# Altium PCB 12.4呼叫器.PcbDoc (part 2 of 5)
Units mm, origin at the board's own origin, x right, y up, seen from the top; angles counter-clockwise.
Board outline 60 x 92 mm, 2 copper layers (Top Layer, Bottom Layer); 66 components, 44 nets, 270 pads, 58 vias.
Unrouted connection lines stored in the file: 4.
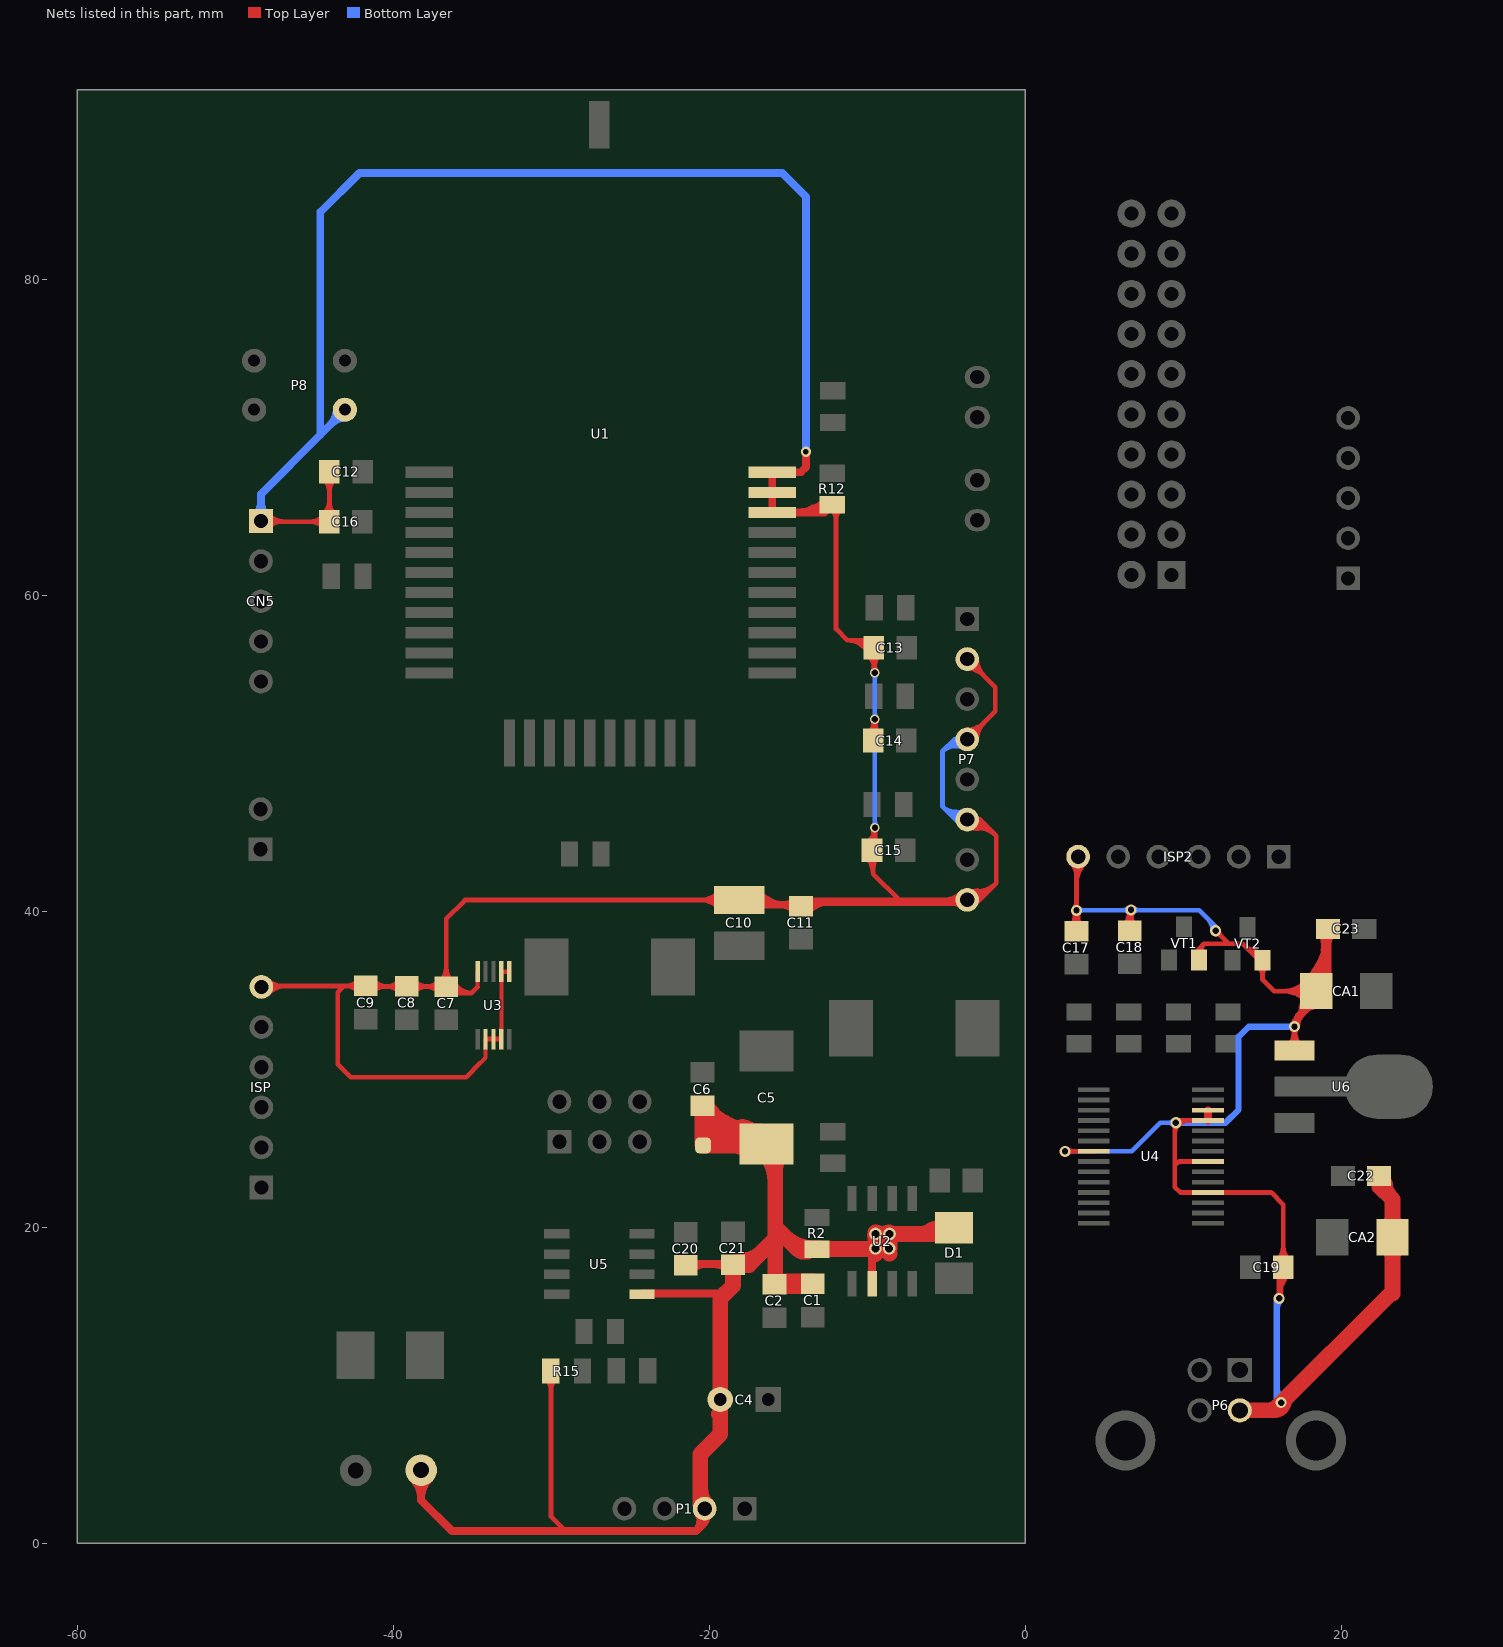
[diagram p2: the nets of this part, all layers, seen from the top]

## Via types
v1: diameter 0.6, hole 0.4, Top Layer to Bottom Layer, 39 vias
v2: diameter 0.7, hole 0.4, Top Layer to Bottom Layer, 11 vias
v3: diameter 1.27, hole 0.711, Top Layer to Bottom Layer, 3 vias
v4: diameter 0.8, hole 0.5, Top Layer to Bottom Layer, 3 vias
v5: diameter 0.65, hole 0.35, Top Layer to Bottom Layer, 1 vias
v6: diameter 0.7, hole 0.5, Top Layer to Bottom Layer, 1 vias

## Nets (pads, with @x,y where several pads share a name; then routed paths per layer and width w, separated by ;. In a path a pad name is that pad's centre, name@x,y a point inside that pad or via, vN(x,y) a via of type N, cw(c..) or ccw(c..) an arc to the next point about the centre after c; other vN are vias at no path point) (continued)
GND: C1.1 C2.1 C4.2 C5.2 C6.1 C7.1 C8.1 C9.1 C10.2 C11.1 C12.1 C13.1 C14.1 C15.1 C16.1 C17.1 C18.1 C19.1 C20.1 C21.1 C22.1 C23.1 CA1.2 CA2.2 CN5.1 D1.1 ISP2.6 ISP.6 P1.2 P6.4 P7.2 P7.4 P7.6 P7.8 P8.2 pad.0 pad.1@-8.58,19.57 pad.2 pad.3 pad.5 R2.2 R12.1 R15.1 U1.30 U1.31 U1.32 U2.6 U3.2 U3.3 U3.4 U3.6 U3.7 U3.10 U4.7 U4.18 U4.21 U4.25 U4.26 U5.5 U6.1 VT1.2 VT2.2 | length 1189.8
  Top Layer w0.26: -34.648,35.202 U3.10@-34.648,36.181 ; -34.468,30.404 -34.148,30.724 U3.2@-34.148,31.906 ; U3.4@-33.168,31.906 -33.168,32.577 -33.148,32.597 U3.7@-33.148,36.181
  Top Layer w0.3: CN5.1@-48.362,64.694 -48.322,64.654 C16.1@-44.054,64.654 -44.029,64.679 C12.1@-44.029,67.804 ; ISP.6@-48.336,35.204 -48.275,35.266 -43.093,35.266 ; C9.1@-41.721,35.266 -43.093,35.266 ; C9.1@-41.682,35.226 C7.1@-36.638,35.226 ; -34.648,35.202 -35.027,34.823 ; -34.468,30.404 -35.382,29.489 -42.672,29.489 -43.497,30.315 -43.497,34.861 -43.093,35.266 ; U3.2@-34.061,31.902 U3.3@-33.648,31.906 -33.299,31.906 ; U3.7@-33.045,36.17 U3.6@-32.648,36.181 ; R15.1@-30.01,10.89 -30.01,1.689 -29.083,0.762 ; R12.1@-12.21,65.72 -11.96,65.47 -11.96,57.86 -11.24,57.14 ; C13.1@-9.7,57.14 -11.24,57.14 ; C13.1@-9.606,56.841 -9.51,56.745 v1(-9.51,55.093) ; C14.1@-9.51,50.9 v1(-9.51,52.146) ; v2(2.53,24.8) U4.7@4.34,24.8 ; C17.1@3.25,38.74 v2(3.25,40.056) ISP2.6@3.25,43.34 ; C18.1@6.63,38.77 6.63,40.006 v2(6.706,40.081) ; v2@9.48,26.42 9.48,23.91 ; v2@9.81,26.75 U4.25@11.579,26.75 ; VT1.2@11.01,36.91 11.01,37.617 ; U4.21@11.579,24.15 9.72,24.15 9.48,23.91 ; v2(12.065,38.76) 12.073,38.76 12.903,37.93 ; v2@15.937,15.635 ccw(c15.595,15.977) 16.078,15.977 ccw(c16.561,15.977) v2@16.22,15.635 ; v2@15.978,15.667 ccw(c15.748,16.066) 16.193,15.947 ; C19.1@15.989,17.918 ccw(c15.135,18.771) 16.343,18.771 ccw(c17.55,18.771) C19.1@16.696,17.918 ; v2@16.078,15.519 cw(c18.188,15.519) C19.1@16.696,17.011 ; 16.078,16.243 cw(c17.464,16.243) C19.1@16.484,17.223 ; v2@16.089,15.504 v2(16.078,15.494) 16.078,17.2 C19.1@16.343,17.464 16.343,21.427 15.57,22.2 9.82,22.2 9.48,22.54 9.48,23.91 ; 16.201,15.977 ccw(c16.689,15.846) v2@16.251,15.594 ; CA1.2@18.39,34.646 18.39,34.901 CA1.2@18.426,34.937 ; CA1.2@19.18,35.691 CA1.2@18.426,34.937 ; CN5.1@-48.149,64.906 ccw(c-47.541,65.514) -47.541,64.654 ; CN5.1@-48.149,64.906 ccw(c-47.541,65.514) -47.541,64.654 ; CN5.1@-48.149,64.906 ccw(c-47.541,65.514) -47.541,64.654 ; ISP.6@-48.124,34.992 cw(c-47.464,34.332) -47.464,35.266 ; ISP.6@-48.124,34.992 cw(c-47.464,34.332) -47.464,35.266 ; ISP.6@-48.124,34.992 cw(c-47.464,34.332) -47.464,35.266 ; CN5.1@-47.937,64.27 cw(c-47.009,63.341) -47.009,64.654 ; CN5.1@-47.937,64.27 cw(c-47.009,63.341) -47.009,64.654 ; CN5.1@-47.937,64.27 cw(c-47.009,63.341) -47.009,64.654 ; CN5.1@-47.937,65.118 ccw(c-46.817,66.238) -46.817,64.654 ; CN5.1@-47.937,65.118 ccw(c-46.817,66.238) -46.817,64.654 ; CN5.1@-47.937,65.118 ccw(c-46.817,66.238) -46.817,64.654 ; ISP.6@-47.912,34.78 cw(c-46.74,33.608) -46.74,35.266 ; ISP.6@-47.912,34.78 cw(c-46.74,33.608) -46.74,35.266 ; ISP.6@-47.912,34.78 cw(c-46.74,33.608) -46.74,35.266 ; ISP.6@-47.912,35.629 ccw(c-47.035,36.505) -47.035,35.266 ; ISP.6@-47.912,35.629 ccw(c-47.035,36.505) -47.035,35.266 ; ISP.6@-47.912,35.629 ccw(c-47.035,36.505) -47.035,35.266 ; -45.261,64.654 cw(c-45.261,63.447) C16.1@-44.408,64.3 ; -45.261,64.654 ccw(c-45.261,65.861) C16.1@-44.408,65.008 ; -45.261,64.654 ccw(c-45.261,65.861) C16.1@-44.408,65.008 ; -45.261,64.654 cw(c-45.261,63.447) C16.1@-44.408,64.3 ; -45.261,64.654 ccw(c-45.261,65.861) C16.1@-44.408,65.008 ; -45.261,64.654 cw(c-45.261,63.447) C16.1@-44.408,64.3 ; C16.1@-44.408,65.108 ccw(c-45.322,66.022) -44.029,66.022 ; C16.1@-44.408,65.108 ccw(c-45.322,66.022) -44.029,66.022 ; C16.1@-44.408,65.108 ccw(c-45.322,66.022) -44.029,66.022 ; C12.1@-44.382,67.35 cw(c-45.236,66.496) -44.029,66.496 ; C12.1@-44.382,67.35 cw(c-45.236,66.496) -44.029,66.496 ; C12.1@-44.382,67.35 cw(c-45.236,66.496) -44.029,66.496 ; -44.029,65.9 ccw(c-42.908,65.9) C16.1@-43.7,65.108 ; -44.029,65.9 ccw(c-42.908,65.9) C16.1@-43.7,65.108 ; -44.029,65.9 ccw(c-42.908,65.9) C16.1@-43.7,65.108 ; -44.029,66.496 cw(c-42.821,66.496) C12.1@-43.675,67.35 ; -44.029,66.496 cw(c-42.821,66.496) C12.1@-43.675,67.35 ; -44.029,66.496 cw(c-42.821,66.496) C12.1@-43.675,67.35 ; -43.028,35.266 cw(c-43.028,34.058) C9.1@-42.175,34.912 ; -43.028,35.266 ccw(c-43.028,36.473) C9.1@-42.175,35.619 ; -43.028,35.266 ccw(c-43.028,36.473) C9.1@-42.175,35.619 ; -43.028,35.266 cw(c-43.028,34.058) C9.1@-42.175,34.912 ; -43.028,35.266 ccw(c-43.028,36.473) C9.1@-42.175,35.619 ; -43.028,35.266 cw(c-43.028,34.058) C9.1@-42.175,34.912 ; C9.1@-41.268,34.912 cw(c-40.51,34.154) -40.51,35.226 ; C9.1@-41.268,34.912 cw(c-40.51,34.154) -40.51,35.226 ; C9.1@-41.268,34.912 cw(c-40.51,34.154) -40.51,35.226 ; C9.1@-41.268,35.619 ccw(c-40.318,36.568) -40.318,35.226 ; C9.1@-41.268,35.619 ccw(c-40.318,36.568) -40.318,35.226 ; C9.1@-41.268,35.619 ccw(c-40.318,36.568) -40.318,35.226 ; -40.472,35.226 ccw(c-40.472,36.482) C8.1@-39.584,35.594 ; -40.472,35.226 ccw(c-40.472,36.482) C8.1@-39.584,35.594 ; -40.472,35.226 ccw(c-40.472,36.482) C8.1@-39.584,35.594 ; -40.403,35.226 cw(c-40.403,34.067) C8.1@-39.584,34.887 ; -40.403,35.226 cw(c-40.403,34.067) C8.1@-39.584,34.887 ; -40.403,35.226 cw(c-40.403,34.067) C8.1@-39.584,34.887 ; C8.1@-38.677,34.887 cw(c-37.858,34.067) -37.858,35.226 ; C8.1@-38.677,34.887 cw(c-37.858,34.067) -37.858,35.226 ; C8.1@-38.677,34.887 cw(c-37.858,34.067) -37.858,35.226 ; C8.1@-38.677,35.594 ccw(c-37.789,36.482) -37.789,35.226 ; C8.1@-38.677,35.594 ccw(c-37.789,36.482) -37.789,35.226 ; C8.1@-38.677,35.594 ccw(c-37.789,36.482) -37.789,35.226 ; -37.945,35.226 cw(c-37.945,34.019) C7.1@-37.092,34.872 ; -37.945,35.226 ccw(c-37.945,36.433) C7.1@-37.092,35.58 ; -37.945,35.226 ccw(c-37.945,36.433) C7.1@-37.092,35.58 ; -37.945,35.226 cw(c-37.945,34.019) C7.1@-37.092,34.872 ; -37.945,35.226 ccw(c-37.945,36.433) C7.1@-37.092,35.58 ; -37.945,35.226 cw(c-37.945,34.019) C7.1@-37.092,34.872 ; C7.1@-36.992,35.58 ccw(c-37.845,36.433) -36.638,36.433 ; C7.1@-36.992,35.58 ccw(c-37.845,36.433) -36.638,36.433 ; C7.1@-36.992,35.58 ccw(c-37.845,36.433) -36.638,36.433 ; C7.1@-36.638,35.226 -36.235,34.823 -35.027,34.823 ; C7.1@-36.638,35.226 -36.638,39.511 -35.443,40.706 C10.2@-18.078,40.706 -18.078,40.647 -17.752,40.32 C11.1@-14.188,40.32 C11.1@-14.028,40.48 ; -36.638,36.433 ccw(c-35.431,36.433) C7.1@-36.284,35.58 ; -36.638,36.433 ccw(c-35.431,36.433) C7.1@-36.284,35.58 ; -36.638,36.433 ccw(c-35.431,36.433) C7.1@-36.284,35.58 ; C7.1@-36.362,35.321 ccw(c-35.529,35.769) -35.529,34.823 ; C7.1@-36.362,35.321 ccw(c-35.529,35.769) -35.529,34.823 ; C7.1@-36.362,35.321 ccw(c-35.529,35.769) -35.529,34.823 ; C7.1@-36.098,35.463 ccw(c-35.027,36.04) -35.027,34.823 ; C7.1@-36.098,35.463 ccw(c-35.027,36.04) -35.027,34.823 ; C7.1@-36.098,35.463 ccw(c-35.027,36.04) -35.027,34.823 ; R15.1@-30.293,10.357 cw(c-30.976,9.674) -30.01,9.674 ; R15.1@-30.293,10.357 cw(c-30.976,9.674) -30.01,9.674 ; R15.1@-30.293,10.357 cw(c-30.976,9.674) -30.01,9.674 ; -30.01,9.674 cw(c-29.044,9.674) R15.1@-29.727,10.357 ; -30.01,9.674 cw(c-29.044,9.674) R15.1@-29.727,10.357 ; -30.01,9.674 cw(c-29.044,9.674) R15.1@-29.727,10.357 ; -20.589,40.706 cw(c-20.589,38.896) C10.2@-19.309,40.176 ; -20.589,40.706 ccw(c-20.589,42.517) C10.2@-19.309,41.237 ; -20.589,40.706 ccw(c-20.589,42.517) C10.2@-19.309,41.237 ; -20.589,40.706 cw(c-20.589,38.896) C10.2@-19.309,40.176 ; -20.589,40.706 ccw(c-20.589,42.517) C10.2@-19.309,41.237 ; -20.589,40.706 cw(c-20.589,38.896) C10.2@-19.309,40.176 ; -19.865,40.706 cw(c-19.865,39.62) C10.2@-19.096,40.388 ; -19.865,40.706 ccw(c-19.865,41.793) C10.2@-19.096,41.024 ; -19.865,40.706 ccw(c-19.865,41.793) C10.2@-19.096,41.024 ; -19.865,40.706 cw(c-19.865,39.62) C10.2@-19.096,40.388 ; -19.865,40.706 ccw(c-19.865,41.793) C10.2@-19.096,41.024 ; -19.865,40.706 cw(c-19.865,39.62) C10.2@-19.096,40.388 ; C10.2@-17.272,40.812 ccw(c-16.084,42) -16.084,40.32 ; C10.2@-17.272,40.812 ccw(c-16.084,42) -16.084,40.32 ; C10.2@-17.272,40.812 ccw(c-16.084,42) -16.084,40.32 ; C10.2@-17.06,41.024 ccw(c-15.36,42.724) -15.36,40.32 ; C10.2@-17.06,41.024 ccw(c-15.36,42.724) -15.36,40.32 ; C10.2@-17.06,41.024 ccw(c-15.36,42.724) -15.36,40.32 ; C10.2@-16.848,40.176 cw(c-16.499,39.827) C10.2@-16.499,40.32 ; C10.2@-16.848,40.176 cw(c-16.499,39.827) C10.2@-16.499,40.32 ; C10.2@-16.848,40.176 cw(c-16.499,39.827) C10.2@-16.499,40.32 ; C10.2@-16.848,41.237 ccw(c-14.636,43.449) C11.1@-14.636,40.32 ; C10.2@-16.848,41.237 ccw(c-14.636,43.449) C11.1@-14.636,40.32 ; C10.2@-16.848,41.237 ccw(c-14.636,43.449) C11.1@-14.636,40.32 ; -15.644,40.518 ccw(c-15.368,41.926) C11.1@-14.567,40.735 ; -15.644,40.518 ccw(c-15.368,41.926) C11.1@-14.567,40.735 ; -15.644,40.518 ccw(c-15.368,41.926) C11.1@-14.567,40.735 ; -15.644,40.518 ccw(c-15.368,41.926) C11.1@-14.567,40.735 ; -15.495,40.32 cw(c-15.495,39.113) C11.1@-14.641,39.967 ; -15.495,40.32 ccw(c-15.495,41.527) C11.1@-14.641,40.674 ; -15.495,40.32 ccw(c-15.495,41.527) C11.1@-14.641,40.674 ; -15.495,40.32 cw(c-15.495,39.113) C11.1@-14.641,39.967 ; -15.495,40.32 ccw(c-15.495,41.527) C11.1@-14.641,40.674 ; -15.495,40.32 cw(c-15.495,39.113) C11.1@-14.641,39.967 ; -15.327,40.455 cw(c-15.515,39.495) C11.1@-14.702,40.041 ; -15.327,40.455 cw(c-15.515,39.495) C11.1@-14.702,40.041 ; -15.327,40.455 cw(c-15.515,39.495) C11.1@-14.702,40.041 ; -15.327,40.455 cw(c-15.515,39.495) C11.1@-14.702,40.041 ; C11.1@-14.165,40.257 ccw(c-13.737,40.606) C11.1@-13.457,40.129 ; C11.1@-14.165,40.257 ccw(c-13.737,40.606) C11.1@-13.457,40.129 ; C11.1@-14.165,40.257 ccw(c-13.737,40.606) C11.1@-13.457,40.129 ; C11.1@-14.158,40.391 cw(c-13.373,39.606) -13.373,40.716 ; C11.1@-14.158,40.391 cw(c-13.373,39.606) -13.373,40.716 ; C11.1@-14.158,40.391 cw(c-13.373,39.606) -13.373,40.716 ; C11.1@-14.028,40.48 -3.65,40.48 -3.64,40.49 -3.09,40.49 -1.82,41.76 ; C11.1@-14.028,40.48 -13.792,40.716 -7.976,40.716 ; C11.1@-13.946,40.179 cw(c-13.219,39.452) -13.219,40.48 ; C11.1@-13.946,40.179 cw(c-12.649,38.881) -12.649,40.716 ; C11.1@-13.946,40.179 cw(c-12.649,38.881) -12.649,40.716 ; C11.1@-13.946,40.179 cw(c-13.219,39.452) -13.219,40.48 ; C11.1@-13.946,40.179 cw(c-12.649,38.881) -12.649,40.716 ; C11.1@-13.946,40.179 cw(c-13.219,39.452) -13.219,40.48 ; C11.1@-13.932,40.446 ccw(c-13.462,40.829) -13.156,40.306 ; C11.1@-13.932,40.446 ccw(c-13.462,40.829) -13.156,40.306 ; C11.1@-13.932,40.446 ccw(c-13.462,40.829) -13.156,40.306 ; C11.1@-13.734,39.967 cw(c-12.495,38.727) -12.495,40.48 ; C11.1@-13.734,39.967 cw(c-11.924,38.157) -11.924,40.716 ; C11.1@-13.734,39.967 cw(c-11.924,38.157) -11.924,40.716 ; C11.1@-13.734,39.967 cw(c-12.495,38.727) -12.495,40.48 ; C11.1@-13.734,39.967 cw(c-11.924,38.157) -11.924,40.716 ; C11.1@-13.734,39.967 cw(c-12.495,38.727) -12.495,40.48 ; C11.1@-13.734,40.674 ccw(c-13.266,41.142) -13.266,40.48 ; C11.1@-13.734,40.674 ccw(c-13.266,41.142) -13.266,40.48 ; C11.1@-13.734,40.674 ccw(c-13.266,41.142) -13.266,40.48 ; C11.1@-13.729,40.669 ccw(c-13.429,40.96) -13.22,40.598 ; C11.1@-13.729,40.669 ccw(c-13.429,40.96) -13.22,40.598 ; C11.1@-13.729,40.669 ccw(c-13.429,40.96) -13.22,40.598 ; C11.1@-13.7,40.636 ccw(c-13.188,41.052) -12.854,40.483 ; C11.1@-13.7,40.636 ccw(c-13.188,41.052) -12.854,40.483 ; C11.1@-13.7,40.636 ccw(c-13.188,41.052) -12.854,40.483 ; C11.1@-13.605,40.191 cw(c-13.076,40.049) -13.35,40.523 ; C11.1@-13.605,40.191 cw(c-13.076,40.049) -13.35,40.523 ; C11.1@-13.605,40.191 cw(c-13.076,40.049) -13.35,40.523 ; R12.1@-12.243,65.437 cw(c-12.926,64.754) -11.96,64.754 ; R12.1@-12.243,65.437 cw(c-12.926,64.754) -11.96,64.754 ; R12.1@-12.243,65.437 cw(c-12.926,64.754) -11.96,64.754 ; -11.96,64.754 cw(c-10.994,64.754) R12.1@-11.677,65.437 ; -11.96,64.754 cw(c-10.994,64.754) R12.1@-11.677,65.437 ; -11.96,64.754 cw(c-10.994,64.754) R12.1@-11.677,65.437 ; -11.24,57.14 cw(c-11.24,55.622) C13.1@-9.996,56.492 ; -11.24,57.14 cw(c-11.24,55.622) C13.1@-9.996,56.492 ; -11.24,57.14 cw(c-11.24,55.622) C13.1@-9.996,56.492 ; -10.664,57.14 cw(c-10.664,56.025) C13.1@-9.75,56.664 ; -10.664,57.14 cw(c-10.664,56.025) C13.1@-9.75,56.664 ; -10.664,57.14 cw(c-10.664,56.025) C13.1@-9.75,56.664 ; C13.1@-9.94,56.225 cw(c-10.977,55.187) v1@-9.51,55.187 ; C13.1@-9.94,56.225 cw(c-10.977,55.187) v1@-9.51,55.187 ; C13.1@-9.94,56.225 cw(c-10.977,55.187) v1@-9.51,55.187 ; C14.1@-9.922,51.291 ccw(c-10.604,52.146) v1(-9.51,52.146) ; C14.1@-9.922,51.291 ccw(c-10.604,52.146) v1(-9.51,52.146) ; C14.1@-9.922,51.291 ccw(c-10.604,52.146) v1(-9.51,52.146) ; C13.1@-9.728,56.437 cw(c-10.253,55.912) -9.51,55.912 ; C13.1@-9.728,56.437 cw(c-10.253,55.912) -9.51,55.912 ; C13.1@-9.728,56.437 cw(c-10.253,55.912) -9.51,55.912 ; v1@-9.64,52.071 cw(c-9.954,51.89) -9.604,51.796 ; v1@-9.64,52.071 cw(c-9.954,51.89) -9.604,51.796 ; v1@-9.64,52.071 cw(c-9.954,51.89) -9.604,51.796 ; v1@-9.64,52.071 cw(c-9.954,51.89) -9.604,51.796 ; v1@-9.64,52.071 cw(c-9.954,51.89) -9.604,51.796 ; v1@-9.64,52.071 cw(c-9.954,51.89) -9.604,51.796 ; v1@-9.64,55.168 ccw(c-10.026,55.391) -9.595,55.506 ; v1@-9.64,55.168 ccw(c-10.026,55.391) -9.595,55.506 ; v1@-9.64,55.168 ccw(c-10.026,55.391) -9.595,55.506 ; v1@-9.64,55.168 ccw(c-10.026,55.391) -9.595,55.506 ; v1@-9.64,55.168 ccw(c-10.026,55.391) -9.595,55.506 ; v1@-9.64,55.168 ccw(c-10.026,55.391) -9.595,55.506 ; v1@-9.63,45.213 cw(c-9.943,45.032) -9.593,44.938 ; v1@-9.63,45.213 cw(c-9.943,45.032) -9.593,44.938 ; v1@-9.63,45.213 cw(c-9.943,45.032) -9.593,44.938 ; v1@-9.616,52.04 cw(c-9.872,51.784) -9.51,51.784 ; v1@-9.616,52.04 cw(c-9.872,51.784) -9.51,51.784 ; v1@-9.616,52.04 cw(c-9.872,51.784) -9.51,51.784 ; v1@-9.616,55.199 ccw(c-9.872,55.455) -9.51,55.455 ; v1@-9.616,55.199 ccw(c-9.872,55.455) -9.51,55.455 ; v1@-9.616,55.199 ccw(c-9.872,55.455) -9.51,55.455 ; -9.604,51.796 cw(c-9.254,51.703) v1@-9.435,52.016 ; -9.604,51.796 cw(c-9.254,51.703) v1@-9.435,52.016 ; -9.604,51.796 cw(c-9.254,51.703) v1@-9.435,52.016 ; -9.604,51.796 cw(c-9.254,51.703) v1@-9.435,52.016 ; -9.604,51.796 cw(c-9.254,51.703) v1@-9.435,52.016 ; -9.604,51.796 cw(c-9.254,51.703) v1@-9.435,52.016 ; -9.593,44.938 cw(c-9.244,44.845) v1@-9.425,45.158 ; -9.593,44.938 cw(c-9.244,44.845) v1@-9.425,45.158 ; -9.593,44.938 cw(c-9.244,44.845) v1@-9.425,45.158 ; -9.565,55.392 ccw(c-9.296,55.464) v1@-9.435,55.223 ; -9.565,55.392 ccw(c-9.296,55.464) v1@-9.435,55.223 ; -9.565,55.392 ccw(c-9.296,55.464) v1@-9.435,55.223 ; -9.565,55.392 ccw(c-9.296,55.464) v1@-9.435,55.223 ; -9.565,55.392 ccw(c-9.296,55.464) v1@-9.435,55.223 ; -9.565,55.392 ccw(c-9.296,55.464) v1@-9.435,55.223 ; -9.51,51.784 cw(c-9.148,51.784) v1@-9.404,52.04 ; -9.51,51.784 cw(c-9.148,51.784) v1@-9.404,52.04 ; -9.51,51.784 cw(c-9.148,51.784) v1@-9.404,52.04 ; v1@-9.51,51.866 ccw(c-8.644,51.866) C14.1@-9.256,51.254 ; v1@-9.51,51.866 ccw(c-8.644,51.866) C14.1@-9.256,51.254 ; v1@-9.51,51.866 ccw(c-8.644,51.866) C14.1@-9.256,51.254 ; -9.51,55.455 ccw(c-9.148,55.455) v1@-9.404,55.199 ; -9.51,55.455 ccw(c-9.148,55.455) v1@-9.404,55.199 ; -9.51,55.455 ccw(c-9.148,55.455) v1@-9.404,55.199 ; -9.51,55.555 cw(c-8.563,55.555) C13.1@-9.233,56.225 ; -9.51,55.555 cw(c-8.563,55.555) C13.1@-9.233,56.225 ; -9.51,55.555 cw(c-8.563,55.555) C13.1@-9.233,56.225 ; -9.5,44.926 cw(c-9.137,44.926) -9.394,45.182 ccw(c-9.137,44.926) -9.5,44.926 ; -9.5,44.926 ccw(c-9.862,44.926) -9.606,45.182 cw(c-9.862,44.926) -9.5,44.926 ; v1(-9.5,45.288) cw(c-10.642,45.288) -9.978,44.358 ccw(c-10.642,45.288) v1(-9.5,45.288) ; v1(-9.5,45.288) -9.5,43.962 -9.61,43.851 -9.61,42.35 -7.976,40.716 ; -9.441,51.608 cw(c-8.852,51.766) v1@-9.38,52.071 ; -9.441,51.608 cw(c-8.852,51.766) v1@-9.38,52.071 ; -9.441,51.608 cw(c-8.852,51.766) v1@-9.38,52.071 ; -9.441,51.608 cw(c-8.852,51.766) v1@-9.38,52.071 ; -9.441,51.608 cw(c-8.852,51.766) v1@-9.38,52.071 ; -9.441,51.608 cw(c-8.852,51.766) v1@-9.38,52.071 ; -7.976,40.716 P7.8@-3.658,40.716 ; -5.676,40.48 ccw(c-5.676,42.735) P7.8@-4.082,41.14 ; -5.676,40.48 ccw(c-5.676,42.735) P7.8@-4.082,41.14 ; -5.676,40.48 ccw(c-5.676,42.735) P7.8@-4.082,41.14 ; -5.106,40.716 cw(c-5.106,39.268) P7.8@-4.082,40.292 ; -5.106,40.716 ccw(c-5.106,42.165) P7.8@-4.082,41.14 ; -5.106,40.716 ccw(c-5.106,42.165) P7.8@-4.082,41.14 ; -5.106,40.716 cw(c-5.106,39.268) P7.8@-4.082,40.292 ; -5.106,40.716 ccw(c-5.106,42.165) P7.8@-4.082,41.14 ; -5.106,40.716 cw(c-5.106,39.268) P7.8@-4.082,40.292 ; -4.952,40.48 ccw(c-4.952,42.011) P7.8@-3.87,40.928 ; -4.952,40.48 ccw(c-4.952,42.011) P7.8@-3.87,40.928 ; -4.952,40.48 ccw(c-4.952,42.011) P7.8@-3.87,40.928 ; -4.536,40.48 cw(c-4.536,39.838) P7.8@-4.082,40.292 ; -4.536,40.48 cw(c-4.536,39.838) P7.8@-4.082,40.292 ; -4.536,40.48 cw(c-4.536,39.838) P7.8@-4.082,40.292 ; P7.8@-3.872,40.926 cw(c-2.975,40.049) -2.989,41.303 ; P7.8@-3.872,40.926 cw(c-2.975,40.049) -2.989,41.303 ; P7.8@-3.872,40.926 cw(c-2.975,40.049) -2.989,41.303 ; P7.6@-3.869,45.583 ccw(c-2.985,46.473) -2.981,45.219 ; P7.6@-3.869,45.583 ccw(c-2.985,46.473) -2.981,45.219 ; P7.6@-3.869,45.583 ccw(c-2.985,46.473) -2.981,45.219 ; P7.8@-3.658,40.716 cw(c-2.95,40.024) -2.961,41.014 ; P7.8@-3.658,40.716 ccw(c-3.374,41.825) -2.564,41.016 ; P7.8@-3.658,40.716 ccw(c-3.374,41.825) -2.564,41.016 ; P7.8@-3.658,40.716 ccw(c-3.374,41.825) -2.564,41.016 ; P7.8@-3.658,40.716 cw(c-2.95,40.024) -2.961,41.014 ; P7.8@-3.658,40.716 cw(c-2.95,40.024) -2.961,41.014 ; P7.6@-3.658,45.796 ccw(c-2.96,46.498) -2.957,45.509 ; P7.6@-3.658,45.796 cw(c-3.359,44.695) -2.552,45.502 ; P7.6@-3.658,45.796 cw(c-3.359,44.695) -2.552,45.502 ; P7.6@-3.658,45.796 cw(c-3.359,44.695) -2.552,45.502 ; P7.6@-3.658,45.796 ccw(c-2.96,46.498) -2.957,45.509 ; P7.6@-3.658,45.796 ccw(c-2.96,46.498) -2.957,45.509 ; P7.6@-3.658,45.796 -2.846,45.796 ; P7.4@-3.658,50.876 cw(c-2.63,50.666) -2.902,51.679 ; P7.4@-3.658,50.876 ccw(c-3.868,51.904) -2.855,51.632 ; P7.4@-3.658,50.876 ccw(c-3.868,51.904) -2.855,51.632 ; P7.4@-3.658,50.876 ccw(c-3.868,51.904) -2.855,51.632 ; P7.4@-3.658,50.876 cw(c-2.63,50.666) -2.902,51.679 ; P7.4@-3.658,50.876 cw(c-2.63,50.666) -2.902,51.679 ; P7.4@-3.658,50.876 -1.88,52.654 -1.88,54.178 P7.2@-3.658,55.956 ; P7.4@-3.658,51.476 ccw(c-3.658,52.925) -2.633,51.9 ; P7.4@-3.658,51.476 ccw(c-3.658,52.925) -2.633,51.9 ; P7.4@-3.658,51.476 ccw(c-3.658,52.925) -2.633,51.9 ; P7.2@-3.658,55.356 cw(c-3.658,53.908) -2.633,54.932 ; P7.2@-3.658,55.356 cw(c-3.658,53.908) -2.633,54.932 ; P7.2@-3.658,55.356 cw(c-3.658,53.908) -2.633,54.932 ; P7.2@-3.658,55.956 ccw(c-2.63,56.167) -2.902,55.154 ; P7.2@-3.658,55.956 cw(c-3.868,54.929) -2.855,55.2 ; P7.2@-3.658,55.956 cw(c-3.868,54.929) -2.855,55.2 ; P7.2@-3.658,55.956 cw(c-3.868,54.929) -2.855,55.2 ; P7.2@-3.658,55.956 ccw(c-2.63,56.167) -2.902,55.154 ; P7.2@-3.658,55.956 ccw(c-2.63,56.167) -2.902,55.154 ; P7.8@-3.583,41.007 ccw(c-3.222,42.417) -2.192,41.388 ; P7.8@-3.583,41.007 ccw(c-3.222,42.417) -2.192,41.388 ; P7.8@-3.583,41.007 ccw(c-3.222,42.417) -2.192,41.388 ; P7.6@-3.579,45.507 cw(c-3.202,44.12) -2.186,45.136 ; P7.6@-3.579,45.507 cw(c-3.202,44.12) -2.186,45.136 ; P7.6@-3.579,45.507 cw(c-3.202,44.12) -2.186,45.136 ; P7.8@-3.509,41.297 ccw(c-3.07,43.01) -1.82,41.76 ; P7.8@-3.509,41.297 ccw(c-3.07,43.01) -1.82,41.76 ; P7.8@-3.509,41.297 ccw(c-3.07,43.01) -1.82,41.76 ; P7.6@-3.5,45.217 cw(c-3.046,43.544) -1.82,44.77 ; P7.6@-3.5,45.217 cw(c-3.046,43.544) -1.82,44.77 ; P7.6@-3.5,45.217 cw(c-3.046,43.544) -1.82,44.77 ; P7.8@-3.238,41.145 ccw(c-2.917,41.473) -2.912,41.014 ; P7.8@-3.238,41.145 ccw(c-2.917,41.473) -2.912,41.014 ; P7.8@-3.238,41.145 ccw(c-2.917,41.473) -2.912,41.014 ; P7.6@-3.232,45.373 cw(c-2.906,45.05) -2.908,45.509 ; P7.6@-3.232,45.373 cw(c-2.906,45.05) -2.908,45.509 ; P7.6@-3.232,45.373 cw(c-2.906,45.05) -2.908,45.509 ; P7.6@-3.084,45.62 cw(c-2.846,45.548) -2.846,45.796 ; P7.6@-3.084,45.62 cw(c-2.846,45.548) -2.846,45.796 ; P7.6@-3.084,45.62 cw(c-2.846,45.548) -2.846,45.796 ; P7.6@-3.084,45.972 ccw(c-2.846,46.045) -2.846,45.796 ; P7.6@-3.084,45.972 ccw(c-2.846,46.045) -2.846,45.796 ; P7.6@-3.084,45.972 ccw(c-2.846,46.045) -2.846,45.796 ; P7.4@-3.058,50.876 cw(c-1.609,50.876) -2.633,51.9 ; P7.4@-3.058,50.876 cw(c-1.609,50.876) -2.633,51.9 ; P7.4@-3.058,50.876 cw(c-1.609,50.876) -2.633,51.9 ; P7.2@-3.058,55.956 ccw(c-1.609,55.956) -2.633,54.932 ; P7.2@-3.058,55.956 ccw(c-1.609,55.956) -2.633,54.932 ; P7.2@-3.058,55.956 ccw(c-1.609,55.956) -2.633,54.932 ; -2.846,45.796 -1.82,44.77 ; -1.82,41.76 -1.82,44.77 ; v2@2.672,24.659 cw(c3.013,24.317) 3.013,24.8 ; v2@2.672,24.659 cw(c3.013,24.317) 3.013,24.8 ; v2@2.672,24.659 cw(c3.013,24.317) 3.013,24.8 ; v2@2.672,24.941 ccw(c3.013,25.283) 3.013,24.8 ; v2@2.672,24.941 ccw(c3.013,25.283) 3.013,24.8 ; v2@2.672,24.941 ccw(c3.013,25.283) 3.013,24.8 ; C17.1@2.896,39.094 ccw(c2.043,39.947) v2@3.25,39.947 ; C17.1@2.896,39.094 ccw(c2.043,39.947) v2@3.25,39.947 ; C17.1@2.896,39.094 ccw(c2.043,39.947) v2@3.25,39.947 ; ISP2.6@2.936,43.026 cw(c2.177,42.267) 3.25,42.267 ; ISP2.6@2.936,43.026 cw(c2.177,42.267) 3.25,42.267 ; ISP2.6@2.936,43.026 cw(c2.177,42.267) 3.25,42.267 ; v2@3.077,39.956 cw(c2.575,39.666) 3.135,39.517 ; v2@3.077,39.956 cw(c2.575,39.666) 3.135,39.517 ; v2@3.077,39.956 cw(c2.575,39.666) 3.135,39.517 ; v2@3.077,39.956 cw(c2.575,39.666) 3.135,39.517 ; v2@3.077,39.956 cw(c2.575,39.666) 3.135,39.517 ; v2@3.077,39.956 cw(c2.575,39.666) 3.135,39.517 ; v2@3.109,39.914 cw(c2.767,39.573) 3.25,39.573 ; v2@3.109,39.914 cw(c2.767,39.573) 3.25,39.573 ; v2@3.109,39.914 cw(c2.767,39.573) 3.25,39.573 ; v2@3.109,40.197 ccw(c2.767,40.539) 3.25,40.539 ; v2@3.109,40.197 ccw(c2.767,40.539) 3.25,40.539 ; v2@3.109,40.197 ccw(c2.767,40.539) 3.25,40.539 ; v2@3.15,39.883 cw(c2.957,39.548) 3.33,39.648 ; v2@3.15,39.883 cw(c2.957,39.548) 3.33,39.648 ; v2@3.15,39.883 cw(c2.957,39.548) 3.33,39.648 ; v2@3.15,39.883 cw(c2.957,39.548) 3.33,39.648 ; v2@3.15,39.883 cw(c2.957,39.548) 3.33,39.648 ; v2@3.15,39.883 cw(c2.957,39.548) 3.33,39.648 ; 3.17,39.648 cw(c3.543,39.548) v2@3.35,39.883 ; 3.17,39.648 cw(c3.543,39.548) v2@3.35,39.883 ; 3.17,39.648 cw(c3.543,39.548) v2@3.35,39.883 ; 3.17,39.648 cw(c3.543,39.548) v2@3.35,39.883 ; 3.17,39.648 cw(c3.543,39.548) v2@3.35,39.883 ; 3.17,39.648 cw(c3.543,39.548) v2@3.35,39.883 ; 3.25,39.573 cw(c3.733,39.573) v2@3.391,39.914 ; 3.25,39.573 cw(c3.733,39.573) v2@3.391,39.914 ; 3.25,39.573 cw(c3.733,39.573) v2@3.391,39.914 ; v2@3.25,39.947 ccw(c4.457,39.947) C17.1@3.604,39.094 ; v2@3.25,39.947 ccw(c4.457,39.947) C17.1@3.604,39.094 ; v2@3.25,39.947 ccw(c4.457,39.947) C17.1@3.604,39.094 ; 3.25,40.539 ccw(c3.733,40.539) v2@3.391,40.197 ; 3.25,40.539 ccw(c3.733,40.539) v2@3.391,40.197 ; 3.25,40.539 ccw(c3.733,40.539) v2@3.391,40.197 ; 3.25,41.736 cw(c5.074,41.736) ISP2.6@3.784,43.026 ; 3.25,41.736 cw(c5.074,41.736) ISP2.6@3.784,43.026 ; 3.25,41.736 cw(c5.074,41.736) ISP2.6@3.784,43.026 ; 3.25,42.46 cw(c4.35,42.46) ISP2.6@3.572,43.238 ; 3.25,42.46 cw(c4.35,42.46) ISP2.6@3.572,43.238 ; 3.25,42.46 cw(c4.35,42.46) ISP2.6@3.572,43.238 ; 3.365,39.517 cw(c3.925,39.666) v2@3.423,39.956 ; 3.365,39.517 cw(c3.925,39.666) v2@3.423,39.956 ; 3.365,39.517 cw(c3.925,39.666) v2@3.423,39.956 ; 3.365,39.517 cw(c3.925,39.666) v2@3.423,39.956 ; 3.365,39.517 cw(c3.925,39.666) v2@3.423,39.956 ; 3.365,39.517 cw(c3.925,39.666) v2@3.423,39.956 ; C18.1@6.276,39.124 ccw(c5.423,39.977) v2@6.63,39.977 ; C18.1@6.276,39.124 ccw(c5.423,39.977) v2@6.63,39.977 ; C18.1@6.276,39.124 ccw(c5.423,39.977) v2@6.63,39.977 ; 6.507,39.519 cw(c7.126,39.354) v2@6.806,39.908 ; 6.507,39.519 cw(c7.126,39.354) v2@6.806,39.908 ; 6.507,39.519 cw(c7.126,39.354) v2@6.806,39.908 ; 6.507,39.519 cw(c7.126,39.354) v2@6.806,39.908 ; 6.507,39.519 cw(c7.126,39.354) v2@6.806,39.908 ; 6.507,39.519 cw(c7.126,39.354) v2@6.806,39.908 ; v2@6.532,39.981 cw(c6.25,39.818) 6.565,39.734 ; v2@6.532,39.981 cw(c6.25,39.818) 6.565,39.734 ; v2@6.532,39.981 cw(c6.25,39.818) 6.565,39.734 ; v2@6.532,39.981 cw(c6.25,39.818) 6.565,39.734 ; v2@6.532,39.981 cw(c6.25,39.818) 6.565,39.734 ; v2@6.532,39.981 cw(c6.25,39.818) 6.565,39.734 ; C18.1@6.63,39.416 cw(c7.371,39.416) v2@6.847,39.94 ; C18.1@6.63,39.416 cw(c7.371,39.416) v2@6.847,39.94 ; C18.1@6.63,39.416 cw(c7.371,39.416) v2@6.847,39.94 ; v2@6.63,39.977 ccw(c7.837,39.977) C18.1@6.984,39.124 ; v2@6.63,39.977 ccw(c7.837,39.977) C18.1@6.984,39.124 ; v2@6.63,39.977 ccw(c7.837,39.977) C18.1@6.984,39.124 ; 6.747,39.541 cw(c7.155,39.65) v2@6.85,39.943 ; 6.747,39.541 cw(c7.155,39.65) v2@6.85,39.943 ; 6.747,39.541 cw(c7.155,39.65) v2@6.85,39.943 ; 6.747,39.541 cw(c7.155,39.65) v2@6.85,39.943 ; 6.747,39.541 cw(c7.155,39.65) v2@6.85,39.943 ; 6.747,39.541 cw(c7.155,39.65) v2@6.85,39.943 ; 9.48,25.97 cw(c10.183,25.97) v2@9.686,26.467 ; 9.48,25.97 cw(c10.183,25.97) v2@9.686,26.467 ; 9.48,25.97 cw(c10.183,25.97) v2@9.686,26.467 ; v2@9.686,26.467 cw(c10.37,25.782) 10.37,26.75 ; v2@9.686,26.467 cw(c10.37,25.782) 10.37,26.75 ; v2@9.686,26.467 cw(c10.37,25.782) 10.37,26.75 ; v2@9.705,26.727 ccw(c9.901,26.873) 10.023,26.661 ; v2@9.705,26.727 ccw(c9.901,26.873) 10.023,26.661 ; v2@9.705,26.727 ccw(c9.901,26.873) 10.023,26.661 ; VT1.2@10.858,37.375 ccw(c10.741,37.617) 11.01,37.617 ; VT1.2@10.858,37.375 ccw(c10.741,37.617) 11.01,37.617 ; VT1.2@10.858,37.375 ccw(c10.741,37.617) 11.01,37.617 ; 11.01,37.617 ccw(c11.279,37.617) VT1.2@11.162,37.375 ; 11.01,37.617 ccw(c11.279,37.617) VT1.2@11.162,37.375 ; 11.01,37.617 ccw(c11.279,37.617) VT1.2@11.162,37.375 ; 11.01,37.617 11.323,37.93 ; VT1.2@11.049,37.091 cw(c11.404,37.372) 11.084,37.692 ; VT1.2@11.049,37.091 cw(c11.404,37.372) 11.084,37.692 ; VT1.2@11.049,37.091 cw(c11.404,37.372) 11.084,37.692 ; VT1.2@11.285,37.277 cw(c11.67,37.582) 11.323,37.93 ; VT1.2@11.285,37.277 cw(c11.67,37.582) 11.323,37.93 ; VT1.2@11.285,37.277 cw(c11.67,37.582) 11.323,37.93 ; 11.323,37.93 12.903,37.93 ; v2@12.065,38.56 cw(c12.065,38.059) 12.42,38.413 ; v2@12.065,38.56 cw(c12.065,38.059) 12.42,38.413 ; v2@12.065,38.56 cw(c12.065,38.059) 12.42,38.413 ; v2@12.265,38.76 ccw(c12.729,38.76) 12.401,38.432 ; v2@12.265,38.76 ccw(c12.729,38.76) 12.401,38.432 ; v2@12.265,38.76 ccw(c12.729,38.76) 12.401,38.432 ; 12.903,37.93 13.792,37.93 14.832,36.89 VT2.2@15.03,36.89 15.03,35.668 15.761,34.937 CA1.2@18.426,34.937 ; 13.838,37.884 ccw(c15.03,39.076) VT2.2@15.03,37.39 ; 13.838,37.884 ccw(c15.03,39.076) VT2.2@15.03,37.39 ; 13.838,37.884 ccw(c15.03,39.076) VT2.2@15.03,37.39 ; 14.274,37.593 cw(c13.982,36.504) VT2.2@14.986,37.017 ; 14.274,37.593 cw(c13.982,36.504) VT2.2@14.986,37.017 ; 14.274,37.593 cw(c13.982,36.504) VT2.2@14.986,37.017 ; 14.35,37.372 ccw(c15.03,38.052) VT2.2@15.03,37.09 ; 14.35,37.372 ccw(c15.03,38.052) VT2.2@15.03,37.09 ; 14.35,37.372 ccw(c15.03,38.052) VT2.2@15.03,37.09 ; VT2.2@14.783,36.493 cw(c14.185,35.895) 15.03,35.895 ; VT2.2@14.783,36.493 cw(c14.185,35.895) 15.03,35.895 ; VT2.2@14.783,36.493 cw(c14.185,35.895) 15.03,35.895 ; 15.03,35.895 cw(c15.875,35.895) VT2.2@15.278,36.493 ; 15.03,35.895 cw(c15.875,35.895) VT2.2@15.278,36.493 ; 15.03,35.895 cw(c15.875,35.895) VT2.2@15.278,36.493 ; 16.316,34.937 cw(c16.316,32.827) CA1.2@17.808,34.319 ; 16.316,34.937 ccw(c16.316,37.047) CA1.2@17.808,35.555 ; 16.316,34.937 ccw(c16.316,37.047) CA1.2@17.808,35.555 ; 16.316,34.937 cw(c16.316,32.827) CA1.2@17.808,34.319 ; 16.316,34.937 ccw(c16.316,37.047) CA1.2@17.808,35.555 ; 16.316,34.937 cw(c16.316,32.827) CA1.2@17.808,34.319 ; 17.04,34.937 cw(c17.04,33.551) CA1.2@18.02,34.531 ; 17.04,34.937 ccw(c17.04,36.323) CA1.2@18.02,35.343 ; 17.04,34.937 ccw(c17.04,36.323) CA1.2@18.02,35.343 ; 17.04,34.937 cw(c17.04,33.551) CA1.2@18.02,34.531 ; 17.04,34.937 ccw(c17.04,36.323) CA1.2@18.02,35.343 ; 17.04,34.937 cw(c17.04,33.551) CA1.2@18.02,34.531 ; C15.1@-10.041,43.398 cw(c-11.083,42.356) -9.61,42.356 ccw(c-11.083,42.356) C15.1@-10.041,43.398 ; C15.1@-9.829,43.61 cw(c-10.358,43.081) -9.61,43.081 ccw(c-10.358,43.081) C15.1@-9.829,43.61 ; C15.1@-9.804,44.114 ccw(c-10.226,44.705) -9.5,44.705 cw(c-10.226,44.705) C15.1@-9.804,44.114 ; -9.61,42.732 cw(c-8.669,42.732) -9.334,43.398 ccw(c-8.669,42.732) -9.61,42.732 ; -9.5,44.704 ccw(c-8.935,44.704) -9.334,44.305 cw(c-8.935,44.704) -9.5,44.704
  Top Layer w0.4: U6.1@17.056,31.189 v2(17.056,32.69) v2@17.056,33.008 ; v2@17.199,32.736 cw(c17.572,32.856) 17.295,33.133 ; CA1.2@18.39,34.646 18.39,34.341 v2@17.056,33.008 ; CA1.2@19.18,35.691 C23.1@19.18,38.88 ; U6.1@16.749,31.496 ccw(c16.006,32.239) 17.056,32.239 ; U6.1@16.749,31.496 ccw(c16.006,32.239) 17.056,32.239 ; U6.1@16.749,31.496 ccw(c16.006,32.239) 17.056,32.239 ; v2@16.95,32.584 cw(c16.694,32.328) 17.056,32.328 ; v2@16.95,32.584 cw(c16.694,32.328) 17.056,32.328 ; v2@16.95,32.584 cw(c16.694,32.328) 17.056,32.328 ; v2@16.981,32.82 ccw(c16.553,33.562) 17.381,33.34 ; v2@16.981,32.82 ccw(c16.553,33.562) 17.381,33.34 ; v2@16.981,32.82 ccw(c16.553,33.562) 17.381,33.34 ; v2@16.982,32.82 ccw(c16.768,33.197) 17.201,33.197 ; v2@16.982,32.82 ccw(c16.768,33.197) 17.201,33.197 ; v2@16.982,32.82 ccw(c16.768,33.197) 17.201,33.197 ; v2@16.982,32.82 ccw(c16.768,33.197) 17.201,33.197 ; 17.056,32.239 ccw(c18.107,32.239) U6.1@17.364,31.496 ; 17.056,32.239 ccw(c18.107,32.239) U6.1@17.364,31.496 ; 17.056,32.239 ccw(c18.107,32.239) U6.1@17.364,31.496 ; 17.056,32.328 cw(c17.419,32.328) v2@17.162,32.584 ; 17.056,32.328 cw(c17.419,32.328) v2@17.162,32.584 ; 17.056,32.328 cw(c17.419,32.328) v2@17.162,32.584 ; v2@17.056,33.008 ccw(c15.664,34.4) CA1.2@17.611,34.695 ; v2@17.056,33.008 ccw(c15.664,34.4) CA1.2@17.611,34.695 ; v2@17.056,33.008 ccw(c15.664,34.4) CA1.2@17.611,34.695 ; v2@17.201,32.729 cw(c18.075,32.963) 17.292,33.415 ; v2@17.201,32.729 cw(c18.075,32.963) 17.292,33.415 ; v2@17.201,32.729 cw(c18.075,32.963) 17.292,33.415 ; v2@17.201,32.729 cw(c18.075,32.963) 17.292,33.415 ; v2@17.201,32.729 cw(c18.075,32.963) 17.292,33.415 ; v2@17.201,32.729 cw(c18.075,32.963) 17.292,33.415 ; v2@17.206,32.69 cw(c18.336,32.69) 17.537,33.488 ; v2@17.206,32.69 cw(c18.336,32.69) 17.537,33.488 ; v2@17.206,32.69 cw(c18.336,32.69) 17.537,33.488 ; CA1.2@17.522,33.899 cw(c19.32,33.697) CA1.2@18.191,35.112 ; CA1.2@17.522,33.899 cw(c19.32,33.697) CA1.2@18.191,35.112 ; CA1.2@17.522,33.899 cw(c19.32,33.697) CA1.2@18.191,35.112 ; 17.616,33.568 ccw(c16.637,34.548) CA1.2@18.007,34.755 ; 17.616,33.568 ccw(c16.637,34.548) CA1.2@18.007,34.755 ; 17.616,33.568 ccw(c16.637,34.548) CA1.2@18.007,34.755 ; 17.772,33.723 cw(c18.426,33.069) CA1.2@18.426,33.994 ; 17.772,33.723 cw(c18.426,33.069) CA1.2@18.426,33.994 ; 17.772,33.723 cw(c18.426,33.069) CA1.2@18.426,33.994 ; CA1.2@17.843,35.639 ccw(c14.616,38.866) C23.1@19.18,38.866 ; CA1.2@17.843,35.639 ccw(c14.616,38.866) C23.1@19.18,38.866 ; CA1.2@17.843,35.639 ccw(c14.616,38.866) C23.1@19.18,38.866 ; CA1.2@18.126,35.356 ccw(c15.582,37.9) 19.18,37.9 ; CA1.2@18.126,35.356 ccw(c15.582,37.9) 19.18,37.9 ; CA1.2@18.126,35.356 ccw(c15.582,37.9) 19.18,37.9 ; CA1.2@18.213,35.852 ccw(c18.06,36.423) 18.572,36.127 ; CA1.2@18.213,35.852 ccw(c18.06,36.423) 18.572,36.127 ; CA1.2@18.213,35.852 ccw(c18.06,36.423) 18.572,36.127 ; CA1.2@18.409,35.073 ccw(c16.548,36.934) 19.18,36.934 ; CA1.2@18.409,35.073 ccw(c16.548,36.934) 19.18,36.934 ; CA1.2@18.409,35.073 ccw(c16.548,36.934) 19.18,36.934 ; CA1.2@18.443,35.88 ccw(c18.457,36.603) 19.084,36.241 ; CA1.2@18.443,35.88 ccw(c18.457,36.603) 19.084,36.241 ; CA1.2@18.443,35.88 ccw(c18.457,36.603) 19.084,36.241 ; 18.658,36.276 ccw(c19.366,35.868) CA1.2@18.747,35.333 ; 18.658,36.276 ccw(c19.366,35.868) CA1.2@18.747,35.333 ; 18.658,36.276 ccw(c19.366,35.868) CA1.2@18.747,35.333 ; C23.1@18.69,38.64 cw(c17.452,37.821) 18.907,37.524 ; C23.1@18.69,38.64 cw(c17.452,37.821) 18.907,37.524 ; C23.1@18.69,38.64 cw(c17.452,37.821) 18.907,37.524 ; C23.1@18.69,38.64 cw(c17.452,37.821) 18.907,37.524 ; C23.1@18.69,38.64 cw(c17.452,37.821) 18.907,37.524 ; CA1.2@18.692,34.79 ccw(c17.513,35.969) CA1.2@19.18,35.969 ; CA1.2@18.692,34.79 ccw(c17.513,35.969) CA1.2@19.18,35.969 ; CA1.2@18.692,34.79 ccw(c17.513,35.969) CA1.2@19.18,35.969 ; C23.1@18.872,38.572 cw(c18.13,37.83) 19.18,37.83 ; C23.1@18.872,38.572 cw(c18.13,37.83) 19.18,37.83 ; C23.1@18.872,38.572 cw(c18.13,37.83) 19.18,37.83 ; 18.939,36.764 ccw(c19.817,36.257) CA1.2@19.05,35.594 ; 18.939,36.764 ccw(c19.817,36.257) CA1.2@19.05,35.594 ; 18.939,36.764 ccw(c19.817,36.257) CA1.2@19.05,35.594 ; 19.029,38.127 cw(c19.633,38.004) C23.1@19.293,38.517 ; 19.029,38.127 cw(c19.633,38.004) C23.1@19.293,38.517 ; 19.029,38.127 cw(c19.633,38.004) C23.1@19.293,38.517 ; 19.029,38.127 cw(c19.633,38.004) C23.1@19.293,38.517 ; 19.029,38.127 cw(c19.633,38.004) C23.1@19.293,38.517 ; 19.084,36.241 ccw(c19.676,35.899) CA1.2@19.109,35.517 ; 19.084,36.241 ccw(c19.676,35.899) CA1.2@19.109,35.517 ; 19.084,36.241 ccw(c19.676,35.899) CA1.2@19.109,35.517 ; 19.18,37.83 cw(c20.23,37.83) C23.1@19.488,38.572 ; 19.18,37.83 cw(c20.23,37.83) C23.1@19.488,38.572 ; 19.18,37.83 cw(c20.23,37.83) C23.1@19.488,38.572
  Top Layer w0.5: pad.0@-38.227,4.623 -38.227,2.718 -36.271,0.762 -29.083,0.762 -20.828,0.762 ; U5.5@-24.21,15.796 -18.984,15.796 ; C20.1@-21.48,17.58 -21.4,17.66 C21.1@-18.49,17.66 ; v5(-13.87,69.07) -13.87,68.1 -14.19,67.78 U1.32@-16.003,67.78 U1.30@-16.003,65.24 -12.69,65.24 R12.1@-12.21,65.72 ; R12.1@-12.01,65.76 R12.1@-11.96,65.71 ; R12.1@-11.829,65.579 R12.1@-11.66,65.41 ; U2.6@-9.684,16.41 -9.684,18.446 -9.52,18.61 -8.65,18.61 pad.3@-8.6,18.66 pad.3@-8.58,18.68 ; U4.25@11.579,26.75 U4.26@11.579,27.4 ; pad.0@-38.757,4.092 cw(c-40.038,2.812) -38.227,2.812 ; pad.0@-38.757,4.092 cw(c-40.038,2.812) -38.227,2.812 ; pad.0@-38.757,4.092 cw(c-40.038,2.812) -38.227,2.812 ; -38.227,2.812 cw(c-36.416,2.812) pad.0@-37.697,4.092 ; -38.227,2.812 cw(c-36.416,2.812) pad.0@-37.697,4.092 ; -38.227,2.812 cw(c-36.416,2.812) pad.0@-37.697,4.092 ; C20.1@-21.097,17.297 cw(c-20.221,16.421) -20.221,17.66 ; C20.1@-21.097,17.297 cw(c-20.221,16.421) -20.221,17.66 ; C20.1@-21.097,17.297 cw(c-20.221,16.421) -20.221,17.66 ; C20.1@-21.097,17.863 ccw(c-20.607,18.353) -20.607,17.66 ; C20.1@-21.097,17.863 ccw(c-20.607,18.353) -20.607,17.66 ; C20.1@-21.097,17.863 ccw(c-20.607,18.353) -20.607,17.66 ; -20.828,0.762 ccw(c-21.481,1.415) P1.2@-20.702,1.912 ; -20.828,0.762 ccw(c-21.481,1.415) P1.2@-20.702,1.912 ; -20.828,0.762 ccw(c-21.481,1.415) P1.2@-20.702,1.912 ; -20.828,0.762 -20.28,1.31 P1.2@-20.28,2.18 ; P1.2@-20.532,1.748 cw(c-20.787,1.31) -20.28,1.31 ; P1.2@-20.532,1.748 cw(c-20.787,1.31) -20.28,1.31 ; P1.2@-20.532,1.748 cw(c-20.787,1.31) -20.28,1.31 ; -20.387,1.203 ccw(c-20.943,1.758) P1.2@-20.28,2.18 ; -20.387,1.203 ccw(c-20.943,1.758) P1.2@-20.28,2.18 ; -20.387,1.203 ccw(c-20.943,1.758) P1.2@-20.28,2.18 ; -20.28,1.31 cw(c-19.773,1.31) P1.2@-20.028,1.748 ; -20.28,1.31 cw(c-19.773,1.31) P1.2@-20.028,1.748 ; -20.28,1.31 cw(c-19.773,1.31) P1.2@-20.028,1.748 ; -19.676,17.66 cw(c-19.676,16.524) C21.1@-18.873,17.327 ; -19.676,17.66 cw(c-19.676,16.524) C21.1@-18.873,17.327 ; -19.676,17.66 cw(c-19.676,16.524) C21.1@-18.873,17.327 ; -19.435,17.66 ccw(c-19.435,18.455) C21.1@-18.873,17.893 ; -19.435,17.66 ccw(c-19.435,18.455) C21.1@-18.873,17.893 ; -19.435,17.66 ccw(c-19.435,18.455) C21.1@-18.873,17.893 ; -14.343,65.24 ccw(c-14.343,67.603) R12.1@-12.672,65.932 ; -14.343,65.24 ccw(c-14.343,67.603) R12.1@-12.672,65.932 ; -14.343,65.24 ccw(c-14.343,67.603) R12.1@-12.672,65.932 ; -13.587,65.404 cw(c-13.044,64.465) R12.1@-12.587,65.448 ; -13.587,65.404 cw(c-13.044,64.465) R12.1@-12.587,65.448 ; -13.587,65.404 cw(c-13.044,64.465) R12.1@-12.587,65.448 ; -13.136,65.24 ccw(c-13.136,66.396) R12.1@-12.319,65.579 ; -13.136,65.24 ccw(c-13.136,66.396) R12.1@-12.319,65.579 ; -13.136,65.24 ccw(c-13.136,66.396) R12.1@-12.319,65.579 ; -9.684,17.782 cw(c-8.592,17.782) pad.2@-9.364,18.554 ; -9.684,17.782 cw(c-8.592,17.782) pad.2@-9.364,18.554 ; -9.684,17.782 cw(c-8.592,17.782) pad.2@-9.364,18.554 ; -9.605,18.137 ccw(c-10,18.365) pad.2@-9.601,18.587 ; -9.605,18.137 ccw(c-10,18.365) pad.2@-9.601,18.587 ; -9.605,18.137 ccw(c-10,18.365) pad.2@-9.601,18.587 ; pad.2@-9.364,18.766 ccw(c-8.987,19.143) pad.3@-8.987,18.61 ; pad.2@-9.364,18.766 ccw(c-8.987,19.143) pad.3@-8.987,18.61 ; pad.2@-9.364,18.766 ccw(c-8.987,19.143) pad.3@-8.987,18.61 ; pad.2@-9.083,18.61 ccw(c-9.083,19.143) pad.3@-8.706,18.766 ; pad.2@-9.083,18.61 ccw(c-9.083,19.143) pad.3@-8.706,18.766 ; pad.2@-9.083,18.61 ccw(c-9.083,19.143) pad.3@-8.706,18.766
  Top Layer w1: P1.2@-20.28,2.18 -20.56,2.46 -20.56,5.63 -19.294,6.896 -19.294,8.18 ; -19.366,8.18 -19.294,8.18 ; C2.1@-15.93,16.29 -15.81,16.41 -15.81,20.01 ; -15.63,19.45 -17.47,17.61 C21.1@-18.49,17.61 -18.49,16.29 -18.984,15.796 -19.294,15.486 C4.2@-19.294,9.09 -19.294,8.18 ; R2.2@-13.17,18.61 R2.2@-12.93,18.61 ; pad.2@-9.52,18.61 R2.2@-12.93,18.61 ; pad.2@-9.47,18.66 pad.0@-9.47,19.57 ; D1.1@-4.486,19.972 -4.888,19.57 pad.1@-8.58,19.57 ; P6.4@13.589,8.407 15.748,8.407 ; 15.402,8.407 ccw(c15.402,9.693) v2@16.311,8.784 ; v2@16.348,8.844 cw(c15.748,9.038) 15.748,8.407 ; C22.1@22.42,22.99 22.42,22.58 23.254,21.746 ; 23.139,15.799 15.748,8.407 ; 23.254,15.799 CA2.2@23.254,19.363 23.254,21.746 ; -20.56,3.46 ccw(c-19,3.46) P1.2@-20.103,2.357 ; -20.56,3.46 ccw(c-19,3.46) P1.2@-20.103,2.357 ; -20.56,3.46 ccw(c-19,3.46) P1.2@-20.103,2.357 ; -20.42,26.5 cw(c-21.106,25.814) pad.5@-20.38,25.17 ; -20.42,26.5 cw(c-21.106,25.814) pad.5@-20.38,25.17 ; -20.42,26.5 cw(c-21.106,25.814) pad.5@-20.38,25.17 ; -20.42,26.5 -19.13,25.21 C5.2@-17.94,25.21 ; -20.42,26.5 -20.42,25.21 pad.5@-20.38,25.17 ; -20.42,26.5 C6.1@-20.42,27.69 C5.2@-17.94,25.21 ; pad.5@-20.38,25.17 -16.44,25.17 C5.2@-16.4,25.21 ; C6.1@-20.208,27.478 ccw(c-16.76,30.927) C5.2@-16.76,26.05 ; C6.1@-20.208,27.478 ccw(c-16.76,30.927) C5.2@-16.76,26.05 ; C6.1@-20.208,27.478 ccw(c-16.76,30.927) C5.2@-16.76,26.05 ; C6.1@-20.175,27.729 ccw(c-19.405,27.935) C6.1@-19.804,27.245 ; C6.1@-20.175,27.729 ccw(c-19.405,27.935) C6.1@-19.804,27.245 ; C6.1@-20.175,27.729 ccw(c-19.405,27.935) C6.1@-19.804,27.245 ; C6.1@-20.175,27.729 ccw(c-19.405,27.935) C6.1@-19.804,27.245 ; -18.885,25.17 ccw(c-18.885,27.375) C5.2@-17.326,25.816 ; -18.885,25.17 ccw(c-18.885,27.375) C5.2@-17.326,25.816 ; -18.885,25.17 ccw(c-18.885,27.375) C5.2@-17.326,25.816 ; -18.788,25.21 ccw(c-18.788,27.278) C5.2@-17.326,25.816 ; -18.788,25.21 ccw(c-18.788,27.278) C5.2@-17.326,25.816 ; -18.788,25.21 ccw(c-18.788,27.278) C5.2@-17.326,25.816 ; -18.595,25.21 cw(c-18.595,23.415) C5.2@-17.326,24.684 ; -18.595,25.21 cw(c-18.595,23.415) C5.2@-17.326,24.684 ; -18.595,25.21 cw(c-18.595,23.415) C5.2@-17.326,24.684 ; -18.501,25.771 ccw(c-16.76,27.513) C5.2@-16.76,25.05 ; -18.501,25.771 ccw(c-16.76,27.513) C5.2@-16.76,25.05 ; -18.501,25.771 ccw(c-16.76,27.513) C5.2@-16.76,25.05 ; -18.498,25.17 cw(c-18.498,23.512) C5.2@-17.326,24.684 ; -18.498,25.17 cw(c-18.498,23.512) C5.2@-17.326,24.684 ; -18.498,25.17 cw(c-18.498,23.512) C5.2@-17.326,24.684 ; C21.1@-18.39,17.76 ccw(c-18.39,20.343) -16.563,18.517 ; C21.1@-18.39,17.76 ccw(c-18.39,20.343) -16.563,18.517 ; C21.1@-18.39,17.76 ccw(c-18.39,20.343) -16.563,18.517 ; C21.1@-18.26,17.535 cw(c-17.518,17.107) -17.74,17.934 ; C21.1@-18.26,17.535 cw(c-17.518,17.107) -17.74,17.934 ; C21.1@-18.26,17.535 cw(c-17.518,17.107) -17.74,17.934 ; C5.2@-17.94,25.21 C5.2@-16.4,25.21 ; C5.2@-17.896,26.354 cw(c-18.453,24.272) C5.2@-16.587,25.35 ; C5.2@-17.896,26.354 cw(c-18.453,24.272) C5.2@-16.587,25.35 ; C5.2@-17.896,26.354 cw(c-18.453,24.272) C5.2@-16.587,25.35 ; C5.2@-16.526,24.684 cw(c-18.254,22.956) -15.81,22.956 ; C5.2@-16.526,24.684 cw(c-18.254,22.956) -15.81,22.956 ; C5.2@-16.526,24.684 cw(c-18.254,22.956) -15.81,22.956 ; C5.2@-16.4,25.21 C5.2@-16.36,25.25 -15.81,24.7 -15.81,20.01 ; -15.81,20.01 -14.45,18.65 ; -15.81,23.681 cw(c-14.391,23.681) C5.2@-15.394,24.684 ; -15.81,23.681 cw(c-14.391,23.681) C5.2@-15.394,24.684 ; -15.81,23.681 cw(c-14.391,23.681) C5.2@-15.394,24.684 ; -15.195,19.395 ccw(c-13.42,21.171) R2.2@-13.42,18.66 ; -15.195,19.395 ccw(c-13.42,21.171) R2.2@-13.42,18.66 ; -15.195,19.395 ccw(c-13.42,21.171) R2.2@-13.42,18.66 ; -14.45,18.65 ccw(c-13.95,19.15) R2.2@-13.455,18.646 ; -14.45,18.65 ccw(c-13.95,19.15) R2.2@-13.455,18.646 ; -14.45,18.65 ccw(c-13.95,19.15) R2.2@-13.455,18.646 ; -14.45,18.65 -12.97,18.65 R2.2@-12.93,18.61 ; pad.0@-9.507,19.477 ccw(c-9.207,20.223) pad.1@-8.703,19.596 ; pad.0@-9.507,19.477 ccw(c-9.207,20.223) pad.1@-8.703,19.596 ; pad.0@-9.507,19.477 ccw(c-9.207,20.223) pad.1@-8.703,19.596 ; pad.0@-9.507,19.477 ccw(c-9.207,20.223) pad.1@-8.703,19.596 ; pad.0@-9.507,19.477 ccw(c-9.207,20.223) pad.1@-8.703,19.596 ; pad.0@-9.5,19.475 ccw(c-9.246,20.29) pad.1@-8.849,19.534 ; pad.0@-9.5,19.475 ccw(c-9.246,20.29) pad.1@-8.849,19.534 ; pad.0@-9.5,19.475 ccw(c-9.246,20.29) pad.1@-8.849,19.534 ; pad.0@-9.5,19.475 ccw(c-9.246,20.29) pad.1@-8.849,19.534 ; pad.0@-9.5,19.475 ccw(c-9.246,20.29) pad.1@-8.849,19.534 ; pad.2@-9.497,18.756 cw(c-9.256,17.905) pad.3@-8.825,18.678 ; pad.2@-9.497,18.756 cw(c-9.256,17.905) pad.3@-8.825,18.678 ; pad.2@-9.497,18.756 cw(c-9.256,17.905) pad.3@-8.825,18.678 ; pad.2@-9.497,18.756 cw(c-9.256,17.905) pad.3@-8.825,18.678 ; pad.2@-9.497,18.756 cw(c-9.256,17.905) pad.3@-8.825,18.678 ; pad.2@-9.47,18.297 cw(c-7.95,18.297) pad.1@-8.624,19.66 ; pad.2@-9.47,18.297 cw(c-7.95,18.297) pad.1@-8.624,19.66 ; pad.2@-9.47,18.297 cw(c-7.95,18.297) pad.1@-8.624,19.66 ; pad.2@-9.47,18.68 cw(c-8.474,18.68) pad.1@-8.592,19.669 ; pad.2@-9.47,18.68 cw(c-8.474,18.68) pad.1@-8.592,19.669 ; pad.2@-9.47,18.68 cw(c-8.474,18.68) pad.1@-8.592,19.669 ; pad.0@-9.47,19.57 ccw(c-8.447,19.57) pad.3@-8.617,18.561 ; pad.0@-9.47,19.57 ccw(c-8.447,19.57) pad.3@-8.617,18.561 ; pad.0@-9.47,19.57 ccw(c-8.447,19.57) pad.3@-8.617,18.561 ; pad.0@-9.458,19.669 cw(c-9.576,18.68) pad.3@-8.58,18.68 ; pad.0@-9.458,19.669 cw(c-9.576,18.68) pad.3@-8.58,18.68 ; pad.0@-9.458,19.669 cw(c-9.576,18.68) pad.3@-8.58,18.68 ; pad.2@-9.456,18.561 ccw(c-9.599,19.57) pad.1@-8.58,19.57 ; pad.2@-9.456,18.561 ccw(c-9.599,19.57) pad.1@-8.58,19.57 ; pad.2@-9.456,18.561 ccw(c-9.599,19.57) pad.1@-8.58,19.57 ; pad.0@-9.427,19.66 cw(c-10.078,18.311) pad.3@-8.58,18.311 ; pad.0@-9.427,19.66 cw(c-10.078,18.311) pad.3@-8.58,18.311 ; pad.0@-9.427,19.66 cw(c-10.078,18.311) pad.3@-8.58,18.311 ; pad.0@-9.385,19.623 cw(c-10.207,19.114) pad.2@-9.295,18.793 ; pad.0@-9.385,19.623 cw(c-10.207,19.114) pad.2@-9.295,18.793 ; pad.0@-9.385,19.623 cw(c-10.207,19.114) pad.2@-9.295,18.793 ; pad.0@-9.385,19.623 cw(c-10.207,19.114) pad.2@-9.295,18.793 ; pad.0@-9.385,19.623 cw(c-10.207,19.114) pad.2@-9.295,18.793 ; pad.2@-9.382,18.613 ccw(c-10.04,18.965) pad.0@-9.341,19.228 ; pad.2@-9.382,18.613 ccw(c-10.04,18.965) pad.0@-9.341,19.228 ; pad.2@-9.382,18.613 ccw(c-10.04,18.965) pad.0@-9.341,19.228 ; pad.2@-9.382,18.613 ccw(c-10.04,18.965) pad.0@-9.341,19.228 ; pad.2@-9.382,18.613 ccw(c-10.04,18.965) pad.0@-9.341,19.228 ; pad.0@-9.382,19.617 cw(c-10.032,19.274) pad.2@-9.344,19.014 ; pad.0@-9.382,19.617 cw(c-10.032,19.274) pad.2@-9.344,19.014 ; pad.0@-9.382,19.617 cw(c-10.032,19.274) pad.2@-9.344,19.014 ; pad.0@-9.382,19.617 cw(c-10.032,19.274) pad.2@-9.344,19.014 ; pad.0@-9.382,19.617 cw(c-10.032,19.274) pad.2@-9.344,19.014 ; pad.0@-9.343,19.594 ccw(c-8.842,20.225) pad.1@-8.543,19.477 ; pad.0@-9.343,19.594 ccw(c-8.842,20.225) pad.1@-8.543,19.477 ; pad.0@-9.343,19.594 ccw(c-8.842,20.225) pad.1@-8.543,19.477 ; pad.0@-9.343,19.594 ccw(c-8.842,20.225) pad.1@-8.543,19.477 ; pad.2@-9.206,18.694 cw(c-8.814,17.958) pad.3@-8.571,18.756 ; pad.2@-9.206,18.694 cw(c-8.814,17.958) pad.3@-8.571,18.756 ; pad.2@-9.206,18.694 cw(c-8.814,17.958) pad.3@-8.571,18.756 ; pad.2@-9.206,18.694 cw(c-8.814,17.958) pad.3@-8.571,18.756 ; pad.0@-9.201,19.534 ccw(c-8.804,20.29) pad.1@-8.55,19.475 ; pad.0@-9.201,19.534 ccw(c-8.804,20.29) pad.1@-8.55,19.475 ; pad.0@-9.201,19.534 ccw(c-8.804,20.29) pad.1@-8.55,19.475 ; pad.0@-9.201,19.534 ccw(c-8.804,20.29) pad.1@-8.55,19.475 ; pad.1@-8.707,19.238 ccw(c-7.953,18.948) pad.3@-8.691,18.619 ; pad.1@-8.707,19.238 ccw(c-7.953,18.948) pad.3@-8.691,18.619 ; pad.1@-8.707,19.238 ccw(c-7.953,18.948) pad.3@-8.691,18.619 ; pad.1@-8.707,19.238 ccw(c-7.953,18.948) pad.3@-8.691,18.619 ; pad.3@-8.58,18.68 pad.1@-8.58,19.57 ; -6.864,19.57 ccw(c-6.864,22.15) D1.1@-5.04,20.326 ; -6.864,19.57 ccw(c-6.864,22.15) D1.1@-5.04,20.326 ; -6.864,19.57 ccw(c-6.864,22.15) D1.1@-5.04,20.326 ; -5.954,19.797 cw(c-5.601,19.185) D1.1@-5.065,19.646 ; -5.954,19.797 cw(c-5.601,19.185) D1.1@-5.065,19.646 ; -5.954,19.797 cw(c-5.601,19.185) D1.1@-5.065,19.646 ; C22.1@22.464,23.136 cw(c22.05,22.486) C22.1@22.803,22.653 ; C22.1@22.464,23.136 cw(c22.05,22.486) C22.1@22.803,22.653 ; C22.1@22.464,23.136 cw(c22.05,22.486) C22.1@22.803,22.653 ; C22.1@22.672,23.244 ccw(c24.664,23.156) 23.254,21.746 ; C22.1@22.672,23.244 ccw(c24.664,23.156) 23.254,21.746 ; C22.1@22.672,23.244 ccw(c24.664,23.156) 23.254,21.746 ; CA2.2@22.883,18.873 cw(c21.989,17.979) 23.254,17.979 ; CA2.2@22.883,18.873 cw(c21.989,17.979) 23.254,17.979 ; CA2.2@22.883,18.873 cw(c21.989,17.979) 23.254,17.979 ; CA2.2@22.883,19.853 ccw(c21.989,20.747) 23.254,20.747 ; CA2.2@22.883,19.853 ccw(c21.989,20.747) 23.254,20.747 ; CA2.2@22.883,19.853 ccw(c21.989,20.747) 23.254,20.747 ; 23.254,17.979 cw(c24.519,17.979) CA2.2@23.625,18.873 ; 23.254,17.979 cw(c24.519,17.979) CA2.2@23.625,18.873 ; 23.254,17.979 cw(c24.519,17.979) CA2.2@23.625,18.873 ; 23.254,20.747 ccw(c24.519,20.747) CA2.2@23.625,19.853 ; 23.254,20.747 ccw(c24.519,20.747) CA2.2@23.625,19.853 ; 23.254,20.747 ccw(c24.519,20.747) CA2.2@23.625,19.853
  Top Layer w1.3: C2.1@-15.81,16.41 C1.1@-13.43,16.41